# Allegro board lgm_rev_p0.brd
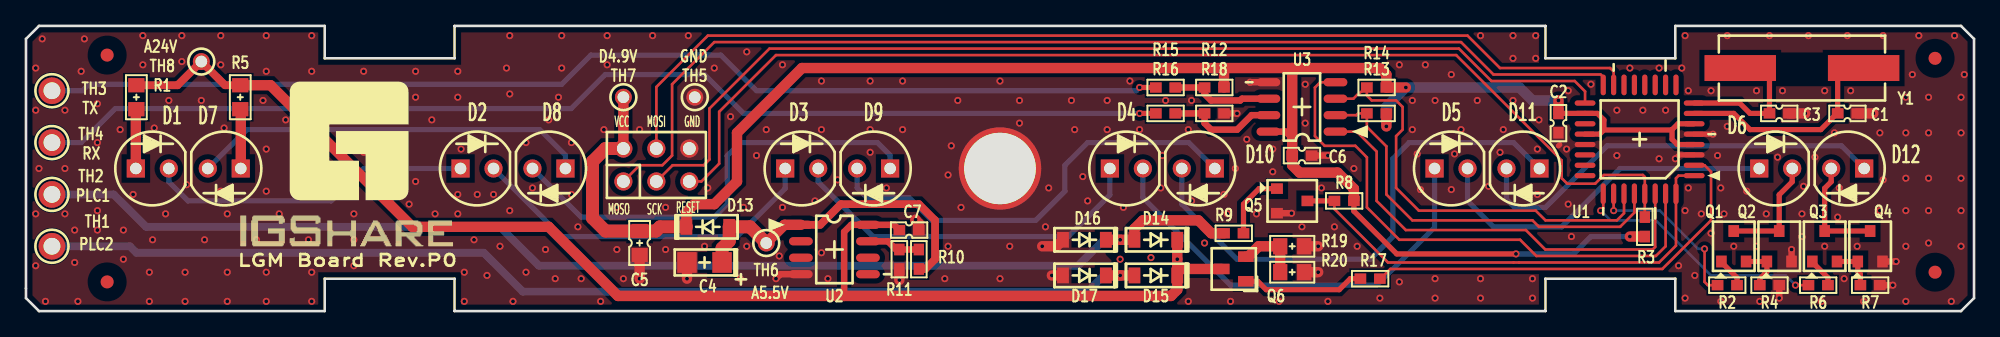
[diagram p0: board, top side]
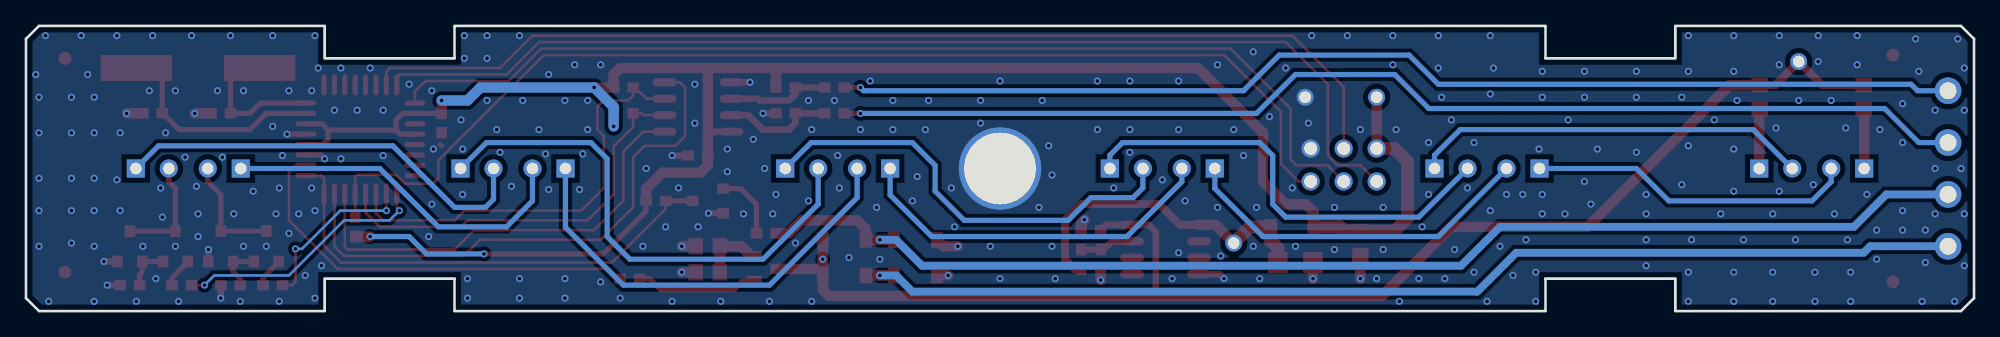
[diagram p1: board, bottom side, seen from below]

Outline 150 x 22 mm; copper layers: TOP, BOTTOM. Coordinates in mm from the lower left corner of the outline.
Outline path: 0,21 0,1 1,0 23,0 23,2.5 33,2.5 33,0 117,0 117,2.5 127,2.5 127,0 149,0 150,1 150,21 149,22 127,22 127,19.5 117,19.5 117,22 33,22 33,19.5 23,19.5 23,22 1,22 0,21

## Placement (name value [footprint] x y rotation side)
C1  15pF  [CC1608]  140.25 15.25 0 top
C2  100nF  [CC1608]  118 14.5 90 top
C3  15pF  [CC1608]  135 15.25 0 top
C4  TCSCS1C685MAAR  [TC3216]  52.25 3.75 180 top
C5  2.2uF  [CC2012]  47.25 5.25 90 top
C6  100nF  [CC1608]  98.25 12 180 top
C7  680nF  [CC1608]  68 6.25 180 top
D1  T05RC07  [LED_5MM]  11 11 90 top
D2  T05RC07  [LED_5MM]  36 11 90 top
D3  T05RC07  [LED_5MM]  61 11 90 top
D4  T05RC07  [LED_5MM]  86 11 90 top
D5  T05RC07  [LED_5MM]  111 11 90 top
D6  T05RC07  [LED_5MM]  136 11 90 top
D7  T05GC03  [LED_5MM]  14 11 270 top
D8  T05GC03  [LED_5MM]  39 11 270 top
D9  T05GC03  [LED_5MM]  64 11 270 top
D10  T05GC03  [LED_5MM]  89 11 270 top
D11  T05GC03  [LED_5MM]  114 11 270 top
D12  T05GC03  [LED_5MM]  139 11 270 top
D13  MMSD4148T1G  [SOD-123]  52.5 6.5 180 top
D14  MMSD4148T1G  [SOD-123]  87 5.5 0 top
D15  MMSD4148T1G  [SOD-123]  87 2.75 0 top
D16  MMSD4148T1G  [SOD-123]  81.5 5.5 0 top
D17  MMSD4148T1G  [SOD-123]  81.5 2.75 0 top
H1  PCB_HOLE  [HOLE5_5]  75 11 0 top
J2  2.54mm_2Row_Header  [HEADER2X3_2_54MM]  46 10 0 top
NOREF  -  []  1 0 90 top
NOREF#2  -  []  12 -49 0 top
NOREF#3  -  [unnamed#2]  6.25 19.75 0 top
NOREF#4  -  [unnamed#2]  147 19.5 0 top
NOREF#5  -  [unnamed#2]  6.25 2.25 0 top
NOREF#6  -  []  16 -24 0 top
NOREF#7  -  []  0 1 0 top
NOREF#8  -  [unnamed#2]  147 3 0 top
NOREF#9  -  []  16.5 5 180 bottom
Q1  MMBT3904  [SOT-23]  131.5 5 0 top
Q2  MMBT3904  [SOT-23]  135 5 0 top
Q3  MMBT3904  [SOT-23]  138.5 5 0 top
Q4  MMBT3904  [SOT-23]  142 5 0 top
Q5  MMBT3904  [SOT-23]  97.5 8.5 270 top
Q6  ZXTN04120HFF_SOT23F  [SOT23F]  93 3.25 90 top
R1  1K  [RC2012]  8.5 16.5 90 top
R2  2.7K  [RC1608]  131 2 0 top
R3  10K  [RC1608]  124.65 6.5 270 top
R4  3K  [RC1608]  134.25 2 180 top
R5  1K  [RC2012]  16.5 16.5 90 top
R6  2.7K  [RC1608]  138 2 0 top
R7  3K  [RC1608]  142 2 180 top
R8  47K  [RC1608]  101.5 8.5 0 top
R9  100K  [RC1608]  93 6 0 top
R10  360K  [RC1608]  68.75 4 270 top
R11  100K  [RC1608]  67.25 4 90 top
R12  4.7K  [RC1608]  91.5 17.25 0 top
R13  4.7K  [RC1608]  104 15.25 0 top
R14  4.7K  [RC1608]  104 17.25 0 top
R15  10  [RC1608]  87.75 17.25 0 top
R16  10  [RC1608]  87.75 15.25 0 top
R17  1K  [RC1608]  103.5 2.5 0 top
R18  4.7K  [RC1608]  91.5 15.25 180 top
R19  15  [RC2012]  97.5 5 180 top
R20  15  [RC2012]  97.5 3 180 top
TH1  TH  [TP_51]  2 5 0 top
TH2  TH  [TP_51]  2 9 0 top
TH3  TH  [TP_51]  2 17 0 top
TH4  TH  [TP_51]  2 13 0 top
TH5  GND  [1PIN-HDR]  51.5 16.5 0 top
TH6  A5.5V  [1PIN-HDR]  57 5.25 0 top
TH7  D4.9V  [1PIN-HDR]  46 16.5 0 top
TH8  A24V  [1PIN-HDR]  13.5 19.25 0 top
U1  ATMEGA48V-10AU  [QFP32_7_9_0_8]  124.25 13.25 180 top
U2  LP2951D  [SOP8_3_9_6_1_27]  62.25 4.75 270 top
U3  SN65176BD/DNI  [SOP8_3_9_6_1_27]  98.25 15.75 90 top
Y1  SX-1(8MHz)  [SX-1]  136.75 18.75 180 top

## Library data of the parts
C1-C3 C6 C7 = _CC1608
C4 = _TC3216
C5 = _CC2012
D1-D12 = _LED_5MM
D13-D17 = _SOD-123
H1 = _HOLE5_5
J2 = _HEADER2X3_2_54MM
Q1-Q5 = _SOT-23
Q6 = _SOT23F
R1 R5 R19 R20 = _RC2012
R2-R4 R6-R18 = _RC1608
TH1-TH4 = _TP_51
TH5-TH8 = _1PIN-HDR
U1 = _QFP32_7_9_0_8
U2 U3 = _SOP8_3_9_6_1_27
Y1 = _SX-1

## Footprints (pads in the part's own frame, mm; a bottom-side part is the same pattern mirrored in y, then rotated)
1PIN-HDR
  round 1.3 hole 0.9: 1(0,0)
CC1608
  rect 0.9x0.8 smd: 1(-0.75,0) 2(0.75,0)
CC2012
  rect 1.1x1.25 smd: 1(-0.925,0) 2(0.925,0)
HEADER2X3_2_54MM
  round 1.397 hole 0.991: 1(0,0) 2(0,2.54) 3(2.54,0) 4(2.54,2.54) 5(5.08,0) 6(5.08,2.54)
HOLE5_5
  round 6.35 hole 5.512: 1(0,0)
LED_5MM
  rect 1.397x1.397 hole 0.889: 1(0,2.54)
  round 1.397 hole 0.889: 2(0,0)
QFP32_7_9_0_8
  oval 1.6x0.4 smd: 1(-4.2,2.8) 2(-4.2,2) 3(-4.2,1.2) 4(-4.2,0.4) 5(-4.2,-0.4) 6(-4.2,-1.2) 7(-4.2,-2) 8(-4.2,-2.8) 17(4.2,-2.8) 18(4.2,-2) 19(4.2,-1.2) 20(4.2,-0.4) 21(4.2,0.4) 22(4.2,1.2) 23(4.2,2) 24(4.2,2.8)
  oval 0.4x1.6 smd: 9(-2.8,-4.2) 10(-2,-4.2) 11(-1.2,-4.2) 12(-0.4,-4.2) 13(0.4,-4.2) 14(1.2,-4.2) 15(2,-4.2) 16(2.8,-4.2) 25(2.8,4.2) 26(2,4.2) 27(1.2,4.2) 28(0.4,4.2) 29(-0.4,4.2) 30(-1.2,4.2) 31(-2,4.2) 32(-2.8,4.2)
RC1608
  rect 0.9x0.8 smd: 1(-0.75,0) 2(0.75,0)
RC2012
  rect 1.1x1.25 smd: 1(-0.925,0) 2(0.925,0)
SOD-123
  rect 0.91x1.22 smd: 1(1.65,0) 2(-1.65,0)
SOP8_3_9_6_1_27
  oval 0.635x1.829 smd: 1(-1.905,-2.583) 2(-0.635,-2.583) 3(0.635,-2.583) 4(1.905,-2.583) 5(1.905,2.583) 6(0.635,2.583) 7(-0.635,2.583) 8(-1.905,2.583)
SOT23F
  rect 0.813x1.194 smd: 1(-0.95,-0.925) 2(0.95,-0.925) 3(0,0.925)
SOT-23
  rect 0.813x0.914 smd: 1(-0.95,-1.175) 2(0.95,-1.175) 3(0,1.175)
SX-1
  rect 5.5x2 smd: 1(-4.75,0) 2(4.75,0)
TC3216
  rect 1.5x1.6 smd: 1(-1.35,0) 2(1.35,0)
TP_51
  round 2.057 hole 1.295: 1(0,0)
unnamed#2
  round 1 smd: (0,0)

## Nets
A5.5V: C4.1 D13.2 R10.2 TH6.1 U2.1
A24V: C7.2 D14.1 D15.1 Q6.3 R1.2 R5.2 TH8.1 U2.8
D4.9V: C2.2 C5.2 C6.2 D13.1 J2.2 R3.2 R8.2 R12.2 R13.2 R14.2 TH7.1 U1.4 U1.6 U1.18 U1.20 U3.8
GND: C1.2 C2.1 C3.2 C4.2 C5.1 C6.1 C7.1 D16.2 D17.2 H1.1 J2.6 Q2.2 Q4.2 Q5.2 R4.1 R7.1 R11.1 R18.1 R19.1 R20.1 TH5.1 U1.3 U1.5 U1.21 U2.4 U3.5
485_DE_EN: R14.1 U1.27 U3.3
485_RE_EN: R13.1 U1.28 U3.2
485_RX: R16.1 TH4.1
485_RXD: U1.30 U3.1
485_TX: R15.1 TH3.1
485_TXD: U1.31 U3.4
LED_GREEN: R6.1 U1.25
LED_RED: R2.1 U1.26
MISO: J2.1 U1.16
MOSI: J2.4 U1.15
PLC1: D14.2 D16.1 R9.1 TH2.1
PLC2: D15.2 D17.1 TH1.1
PLC_RX: Q5.3 R8.1 U1.1 U1.32
PLC_TX: R17.2 U1.2
RESET: J2.5 R3.1 U1.29
N00430: Q6.1 R17.1
N00485: Q6.2 R19.2 R20.2
N00882: R10.1 R11.2 U2.7
N16711905: Q5.1 R9.2
N16712688: R12.1 R15.2 U3.6
N16712703: R16.2 R18.2 U3.7
N16713814: J2.3 U1.17
N16714271: C3.1 U1.8 Y1.2
N16714295: C1.1 U1.7 Y1.1
N16737449: D12.2 Q3.3 Q4.3
N16737453: Q3.2 Q4.1 R7.2
N16737473: Q3.1 R6.2
N16737509: D1.1 R1.1
N16737521: D1.2 D2.1
N16737525: D2.2 D3.1
N16737529: D3.2 D4.1
N16737533: D4.2 D5.1
N16738584: D6.2 Q1.3 Q2.3
N16738588: Q1.2 Q2.1 R4.2
N16738608: Q1.1 R2.2
N16738824: D5.2 D6.1
N16739311: D7.1 R5.1
N16739323: D7.2 D8.1
N16739327: D8.2 D9.1
N16739331: D9.2 D10.1
N16739335: D10.2 D11.1
N16739734: D11.2 D12.1

Pads without a net: U1 9 10 11 12 13 14 19 22 23 24; U2 2 3 5 6

## Via types
v1: diameter 0.55, hole 0.3, TOP to BOTTOM, 340 vias

## Routing (per net, layer and track width the routed paths; a pad name or vN(x,y) marks a point on that pad's centre or on a via; arc(x,y) is an arc through that point)
A5.5V: length 25.7
  TOP w0.6: R10.2 69.25,3.25 70,4 70,7 68.75,8.25 62.75,8.25 61.16,6.66 U2.1
  TOP w0.8: U2.1 58.41,6.66 TH6.1
  TOP w1: C4.1 53.6,4.85 54.15,5.4 D13.2 55.75,6.5 TH6.1
A24V: length 105.6
  TOP w0.5: C7.2 66.84,6.66 U2.8 63.54,6.66 63,6.11 63,1.17
  TOP w0.6: R1.2 11.68,17.43 TH8.1 15.32,17.43 R5.2
  TOP w0.8: 88.65,3.5 D15.1 88.65,1.65 88.17,1.17 45.58,1.17 40.25,6.5 29.75,6.5 18.82,17.43 R5.2 ; 88.65,3.5 v1(88.65,4) D14.1 ; 88.65,3.5 88.9,3.25 Q6.3
D4.9V: length 159.6
  TOP w0.4: U1.6 127.2,14.45 126.75,14 ; v1(114.73,4.41) 105.55,4.41 102.25,7.71 R8.2 ; 121.5,13.97 126.72,13.97 126.75,14 ; 121.5,13.97 121.5,14.75 121,15.25 U1.18 C2.2 ; 121.5,13.97 121.18,13.65 U1.20 ; U1.4 127.15,12.85 126.75,13.25 126.75,14
  TOP w0.5: 97.5,13.35 97,13.85 U3.8
  TOP w0.8: 97.5,18.75 104.25,18.75 104.75,18.25 R14.2 v1(106.25,17.25) ; 97.5,18.75 92.25,18.75 ; 97.5,18.75 C6.2 97.5,11.25 98.07,10.68 101,10.68 102.25,9.43 R8.2 ; R3.2 v1(123.5,5.75) ; R13.2 v1(104.75,14.25) ; C2.2 v1(118,16.25) ; J2.2 TH7.1 ; R12.2 92.25,18.75 ; 92.25,18.75 59.75,18.75 54.75,13.75 54.75,10 53,8.25 51.46,8.25 50.85,7.64 D13.1
  TOP w1: D13.1 48.83,6.5 48.5,6.17 C5.2 44.62,6.17 43.62,7.17 43.62,11.54 44.62,12.54 J2.2
  BOTTOM w0.4: v1(123.5,5.75) 120.5,5.75 119.16,4.41 v1(114.73,4.41)
  BOTTOM w0.8: v1(118,16.25) 116,16.25 115,17.25 v1(106.25,17.25) 104.75,15.75 v1(104.75,14.25)
GND: length 26.1
  TOP w0.4: U1.3 127.3,12.05 v1(127,11.75) ; U1.5 v1(129.9,13.65) ; 118.1,12.85 118,12.75
  TOP w0.5: Q2.2 v1(135.95,4.75) ; C6.1 v1(100.25,12) ; Q4.2 v1(144,3.83) ; Q5.2 v1(97.45,7.55) ; U3.5 v1(94.25,17.66) ; R7.1 v1(143.75,2) ; U2.4 58.09,2.85 v1(57.75,2.5) ; R18.1 v1(93.25,15.25) ; R4.1 v1(135,1)
  TOP w0.8: v1(68.5,7.05) 68.5,7 68.75,6.75 C7.1 ; R20.1 v1(99.5,3) ; C3.2 v1(137,15.25) ; C1.2 v1(142.25,15.25) ; D17.2 v1(78.99,2.75) ; R11.1 v1(67.25,2.4) ; v1(78.25,5) 79.35,5 D16.2 ; R19.1 v1(99.5,5) ; C5.1 v1(47.25,2.5) ; C4.2 v1(50.9,2.5)
  vias: v1(0.75,18.75) v1(0.75,15.5) v1(0.75,7.5) v1(0.75,3.5) v1(1,11) v1(1.25,21) v1(1.5,0.75) v1(3,15.5) v1(3,11) v1(3,7.5) v1(3.75,6.25) v1(3.75,3.75) v1(4,0.75) v1(4.25,18.5) v1(4.5,21) v1(5.5,16) v1(5.5,13) v1(5.5,7.75) v1(5.5,6.25) v1(7.25,14) v1(7.5,6.25) v1(7.5,4) v1(8.25,9) v1(9,21.25) v1(9,19) v1(9.5,3) v1(9.5,0.75) v1(9.75,5.5) v1(9.88,14.12) v1(10.75,7.5) v1(11,16.25) v1(12,21.25) v1(12,19.25) v1(12.25,3) v1(12.25,0.75) v1(12.38,9.75) v1(13.5,16.25) v1(13.75,5.5) v1(15,21.25) v1(15,19) v1(15,9.25) v1(15.25,14.12) v1(15.5,7.5) v1(15.5,3) v1(15.5,0.75) v1(17.75,5.5) v1(18.25,16.25) v1(18.5,21.25) v1(18.5,18.5) v1(18.5,12.5) v1(18.5,9.25) v1(18.5,3) v1(18.5,0.75) v1(19.5,7.5) v1(20,14.75) v1(21.75,5.5) v1(22,21.25) v1(22,18.5) v1(22,12.75) v1(22,3) v1(22,0.75) v1(22.5,16.5) v1(22.5,9.75) v1(25.25,9) v1(25.25,7.5) v1(25.25,5.5) v1(25.25,3.5) v1(26,18.5) v1(26,16.5) v1(26,12.25) v1(29,12.5) v1(29.5,8.25) v1(30,18.5) v1(30,16.5) v1(30,10) v1(31.25,14.75) v1(31.5,7.5) v1(33.25,18.5) v1(33.25,16.5) v1(33.25,9) v1(33.25,7.5) v1(33.5,12.5) v1(33.75,3) v1(33.75,0.75) v1(34.5,5.5) v1(34.75,9) v1(35.5,2.75) v1(36,9) v1(36.5,5) v1(37,18.75) v1(37.25,21.25) v1(37.25,16.75) v1(37.25,7.75) v1(37.5,0.75) v1(38.5,13) v1(38.5,3) v1(39,9.5) v1(40,4.75) v1(40.25,14.75) v1(40.75,2.5) v1(41,16.5) v1(41.25,21.25) v1(41.25,18.75) v1(42,13) v1(42,9) v1(42.5,6.5) v1(42.75,2.5) v1(44.25,0.75) v1(44.5,14) v1(44.75,21.25) v1(44.75,19) v1(45.5,8) v1(45.5,4.75) v1(46,2.5) v1(47.25,14) v1(48.25,21.25) v1(49.25,8) v1(49.25,4.75) v1(51,21.25) v1(51.25,14.5) v1(52.25,5) v1(52.5,9.5) v1(53,18.75) v1(54.25,15) v1(55,2.5) v1(55.25,8) v1(55.5,20) v1(55.5,5) v1(56.25,12) v1(57,14) v1(58,4.25) v1(58.25,19) v1(58.25,8) v1(60.75,8.5) v1(61.25,17.75) v1(61.25,14) v1(61.25,4.5) v1(61.75,2.5) v1(62.5,10.12) v1(65,17.75) v1(65,14) v1(65,12.25) v1(66.25,9.5) v1(67.5,17.75) v1(67.5,14) v1(70.75,2.5) v1(71,10.5) v1(71,5) v1(71.25,12.75) v1(71.75,16.25) v1(72,8) v1(75,17.75) v1(75,2.5) v1(75.75,5) v1(76.5,16.25) v1(76.5,14.5) v1(78.5,6.5) v1(78.75,9.5) v1(80.5,16.25) v1(80.75,14) v1(81.38,10.38) v1(81.75,8.5) v1(83.25,16.25) v1(83.25,14) v1(84.25,4) v1(84.5,8) v1(85,17.75) v1(85.75,14) v1(86.62,4.12) v1(87.38,9.5) v1(87.5,12) v1(87.75,16.25) v1(89.5,14) v1(89.5,0.75) v1(89.75,16.25) v1(89.75,8.5) v1(90.75,5.25) v1(92.25,9) v1(92.5,7.5) v1(92.75,0.75) v1(93.12,11) v1(94,13.25) v1(94.75,7.5) v1(96,12.5) v1(96,10.75) v1(96.5,0.75) v1(98.25,6.5) v1(98.5,17.5) v1(98.5,14.5) v1(99.75,9.5) v1(100.25,0.75) v1(100.75,6.5) v1(102.25,11) v1(102.5,5) v1(104.25,1) v1(105.75,19) v1(105.75,2.25) v1(106.75,16.25) v1(106.75,14) v1(107.12,12.12) v1(107.38,9.38) v1(107.75,19) v1(108.5,16.25) v1(108.5,2.5) v1(108.5,1) v1(109.75,18.25) v1(109.75,9.38) v1(110,12.12) v1(110.5,14) v1(111.75,16.25) v1(112,21.25) v1(112,2.5) v1(112,1) v1(112.62,9.62) v1(113.5,12.25) v1(113.75,14) v1(114.5,21.25) v1(114.5,19.5) v1(114.5,16.25) v1(116,2.5) v1(116,1) v1(116.25,21.25) v1(116.25,19.5) v1(116.38,12.5) v1(116.38,9) v1(116.5,14.75) v1(118.62,12.5) v1(118.75,17) v1(118.75,8.25) v1(119,5.75) v1(120.5,17.5) v1(122.5,15.5) v1(122.5,12) v1(123.5,18.75) v1(124.5,15.5) v1(125.75,18.75) v1(125.75,11.75) v1(126.25,15.5) v1(127.25,3.5) v1(127.5,18.75) v1(127.75,21.25) v1(127.75,7.75) v1(127.75,1) v1(128,17) v1(128,9.5) v1(128.5,2.75) v1(129,7.5) v1(129.75,17) v1(129.75,6) v1(130.25,12) v1(130.5,9.5) v1(130.5,0.75) v1(130.75,7.5) v1(131,21.25) v1(131,14.25) v1(131.5,5) v1(132.5,9.25) v1(133.25,17) v1(133.25,5) v1(133.5,0.75) v1(134,7.5) v1(134.25,21.25) v1(134.88,11.88) v1(135.25,17) v1(136.75,7.5) v1(136.75,5.75) v1(136.88,9.62) v1(137.25,21.25) v1(137.75,11.88) v1(138.25,0.75) v1(138.5,17) v1(138.5,5) v1(139.25,13.75) v1(139.5,7.25) v1(139.62,9.5) v1(140,2.5) v1(140.25,21.25) v1(140.5,17) v1(141,5) v1(141.5,0.75) v1(142.75,13.75) v1(142.75,7.75) v1(143,21.25) v1(143,10.12) v1(144.75,16.5) v1(144.75,13.75) v1(144.75,10.25) v1(144.75,7.75) v1(144.75,5) v1(144.75,0.75) v1(145.25,18.25) v1(145.75,21.25) v1(146.5,16.5) v1(146.5,13.75) v1(146.5,10.25) v1(146.5,7.75) v1(146.5,5.25) v1(148.25,0.75) v1(148.5,21.25) v1(149,16.5) v1(149,13.75) v1(149,10.25) v1(149,7.75) v1(149,5) v1(149.25,18.25)
485_DE_EN: length 33.2
  TOP w0.2: U1.27 123.05,7.55 122.5,7 117,7 116.25,7.75 107.25,7.75 105.5,9.5 105.5,13.5 106,14 106,15.75 105.5,16.25 103.62,16.25 103.25,16.62 R14.1 102.57,16.75 102.21,16.39 U3.3
485_RE_EN: length 31.4
  TOP w0.2: U1.28 123.85,7.6 122.75,6.5 116.5,6.5 116,7 106.75,7 104.75,9 104.75,12.71 103.25,14.21 R13.1 102.57,15.25 102.44,15.12 U3.2
485_RX: length 88.4
  TOP w0.4: R16.1 v1(85.75,15.25)
  BOTTOM w0.4: TH4.1 4.25,13 6.88,15.63 41.98,15.63 44.6,18.25 52.25,18.25 55.25,15.25 v1(85.75,15.25)
485_RXD: length 34.8
  TOP w0.2: U3.1 102.47,13.85 104,12.31 104,8.5 106.25,6.25 115.49,6.25 116.99,4.75 125.25,4.75 125.45,4.95 U1.30
485_TX: length 87.4
  TOP w0.4: R15.1 v1(85.75,17.25)
  BOTTOM w0.4: TH3.1 4.35,17 4.85,17.5 41.25,17.5 43.5,19.75 53.5,19.75 56.25,17 85.5,17 v1(85.75,17.25)
485_TXD: length 43
  TOP w0.2: U3.4 99.66,17.66 99.25,17.25 99.25,13.5 100,12.75 102.36,12.75 103.25,11.86 103.25,8 105.75,5.5 115.05,5.5 116.3,4.25 125.5,4.25 126.25,5 U1.31
LED_GREEN: length 19.8
  TOP w0.2: U1.25 121.45,7.95 v1(121.25,7.75) ; v1(136.25,2) R6.1
  BOTTOM w0.2: v1(136.25,2) 135.5,2.75 129.75,2.75 125.5,7 122,7 v1(121.25,7.75)
LED_RED: length 13.2
  TOP w0.2: R2.1 129.5,2 129.25,2.25 v1(129.25,4.8) ; U1.26 v1(122.25,7.75)
  BOTTOM w0.2: v1(122.25,7.75) 125.8,7.75 128.75,4.8 v1(129.25,4.8)
MISO: length 84.8
  TOP w0.2: J2.1 47.25,11.25 49,11.25 49.75,12 49.75,17.5 53,20.75 110.5,20.75 113,18.25 121.25,18.25 121.45,18.05 U1.16
MOSI: length 82.3
  TOP w0.2: J2.4 48.54,17.29 52.5,21.25 111,21.25 113.5,18.75 121.98,18.75 122.25,18.48 U1.15
PLC1: length 96
  TOP w0.8: D16.1 v1(84.25,5.5) D14.2 85.35,6.35 86,7 90.27,7 91.27,6 R9.1
  BOTTOM w0.6: v1(84.25,5.5) 83,5.5 81,3.5 39.5,3.5 36.5,6.5 9.25,6.5 6.75,9 TH2.1
PLC2: length 86.4
  TOP w0.8: D17.1 v1(84.25,2.75) D15.2
  BOTTOM w0.6: v1(84.25,2.75) 83,2.75 81.75,1.5 38.25,1.5 35.25,4.5 8.5,4.5 8,5 TH1.1
PLC_RX: length 37.9
  TOP w0.2: U1.1 127.25,10.45 127.05,10.25 U1.32 127.05,5.05 125.75,3.75 114.96,3.75 114.96,3.75 114.54,3.75 114.54,3.75 104.87,3.75 100.75,7.87 R8.1
  TOP w0.4: Q5.3 R8.1
PLC_TX: length 32.6
  TOP w0.2: U1.2 129.25,11.25 129.75,10.75 129.75,7 126,3.25 105.05,3.25 104.3,2.5 R17.2
RESET: length 88.3
  TOP w0.2: R3.1 U1.29 124.65,10.35 124.5,10.5 121.5,10.5 120.83,9.83 118.67,9.83 118.25,10.25 118.25,11.62 110.12,19.75 57.75,19.75 53.38,15.38 53.38,11.37 52.01,10 J2.5
N00430: length 9.4
  TOP w0.4: R17.1 101.97,2.5 101.12,1.65 95.5,1.65 94.85,2.3 Q6.1
N00485: length 5
  TOP w0.8: R20.2 R19.2 94.92,5 94.12,4.2 Q6.2
N00882: length 4.2
  TOP w0.5: R10.1 R11.2 67,4.75 66.36,5.38 U2.7
N16711905: length 5.3
  TOP w0.4: Q5.1 94.95,9.45 93.75,8.25 R9.2
N16712688: length 7.9
  TOP w0.5: U3.6 93.64,16.39 93.5,16.25 91.25,16.25 90.75,16.75 R12.1 R15.2
N16712703: length 8.6
  TOP w0.5: U3.7 94.38,15.12 93.26,14 91.25,14 90.75,14.5 R18.2 R16.2
N16713814: length 80.3
  TOP w0.2: U1.17 120.05,16.95 119.25,17.75 112.84,17.75 110.34,20.25 57.25,20.25 52.62,15.62 52.62,11.69 52.19,11.25 49.79,11.25 J2.3
N16714271: length 11.4
  TOP w0.4: U1.8 131.95,16.05 132.75,15.25 C3.1 134.25,18 133.5,18.75 Y1.2
N16714295: length 17.3
  TOP w0.4: U1.7 131.5,15.25 132.75,14 138.2,14 139.45,15.25 C1.1 139.5,18.25 140,18.75 Y1.1
N16737449: length 8.5
  TOP w0.4: D12.2 139,9.97 138.5,9.47 Q3.3 Q4.3
N16737453: length 3.5
  TOP w0.4: R7.2 141.25,2.84 141.05,3.04 Q4.1 Q3.2
N16737473: length 2.3
  TOP w0.4: Q3.1 137.55,3.77 138.75,2.57 R6.2
N16737509: length 4.6
  TOP w0.8: D1.1 8.46,15.54 R1.1
N16737521: length 25.1
  BOTTOM w0.4: D2.1 26,11 23.5,8.5 12.47,8.5 11,9.97 D1.2
N16737525: length 27.7
  BOTTOM w0.4: D2.2 41.25,5.75 54.75,5.75 58.46,9.46 D3.1
N16737529: length 28.6
  BOTTOM w0.4: D3.2 61,9.97 65.22,5.75 80.25,5.75 83.46,8.96 D4.1
N16737533: length 33.9
  BOTTOM w0.4: D4.2 86,8.75 92.75,2 104,2 108.46,6.46 D5.1
N16738584: length 8.7
  TOP w0.4: Q1.3 Q2.3 135,8.97 136,9.97 D6.2
N16738588: length 3.7
  TOP w0.4: Q1.2 Q2.1 134.05,3.04 133.5,2.49 R4.2
N16738608: length 2.3
  TOP w0.4: Q1.1 130.55,3.77 131.75,2.57 R2.2
N16738824: length 27.7
  BOTTOM w0.4: D5.2 111,8.5 113,6.5 118.25,6.5 122.75,11 D6.1
N16739311: length 4.6
  TOP w0.8: R5.1 16.54,15.54 D7.1
N16739323: length 30.6
  BOTTOM w0.4: D7.2 17,14 39.57,14 41.54,12.03 D8.1
N16739327: length 35.1
  BOTTOM w0.4: D8.2 42.75,7.25 53,7.25 54,8.25 54,12 55,13 65.57,13 66.54,12.03 D9.1
N16739331: length 34.6
  BOTTOM w0.4: D9.2 64,9.5 64.75,8.75 68,8.75 69.75,7 77.75,7 80,9.25 80,11.25 81.75,13 89.54,13 D10.1
N16739335: length 40.1
  BOTTOM w0.4: D10.2 89,8.25 93.25,4 103.5,4 105.25,5.75 105.25,11.75 106.5,13 114.54,13 D11.1
N16739734: length 32.9
  BOTTOM w0.4: D12.1 139.79,12.75 121.75,12.75 117,8 114.62,8 114,8.62 D11.2

## Copper pours and planes (outline as drawn; the poured copper is in the pictures)
GND on TOP: 1.21,0.5 0.5,1.21 0.5,20.79 1.21,21.5 22.5,21.5 22.5,19 33.5,19 33.5,21.5 116.5,21.5 116.5,19 127.5,19 127.5,21.5 148.79,21.5 149.5,20.79 149.5,1.21 148.79,0.5 127.5,0.5 127.5,3 116.5,3 116.5,0.5 33.5,0.5 33.5,3 22.5,3 22.5,0.5 ; 6 cut-outs
GND on BOTTOM: 1.21,0.5 0.5,1.21 0.5,20.79 1.21,21.5 22.5,21.5 22.5,19 33.5,19 33.5,21.5 116.5,21.5 116.5,19 127.5,19 127.5,21.5 148.79,21.5 149.5,20.79 149.5,1.21 148.79,0.5 127.5,0.5 127.5,3 116.5,3 116.5,0.5 33.5,0.5 33.5,3 22.5,3 22.5,0.5

## Text on the board
Ref Des/Silkscreen Top: MOSO | VCC | MOSI | SCK | RESET | GND | PLC1 | PLC2 | TX | RX | A24V | D4.9V | A5.5V
User.19: FIGURE | SIZE | 0.30 | 0.89 | 0.90 | 0.99 | 1.30 | 5.51 | DRILL CHART: TOP to BOTTOM | ALL UNITS ARE IN MILLIMETERS | PLATED | QTY | 340 | 24 | 4 | 6 | 1
